# Altium PCB fixture-v1.0.PcbDoc
Units mil, origin at the board's own origin, x right, y up, seen from the top; angles counter-clockwise.
Board outline 4200 x 4200 mil, 2 copper layers (Top Layer, Bottom Layer); 22 components, 16 nets, 81 pads, 0 vias.
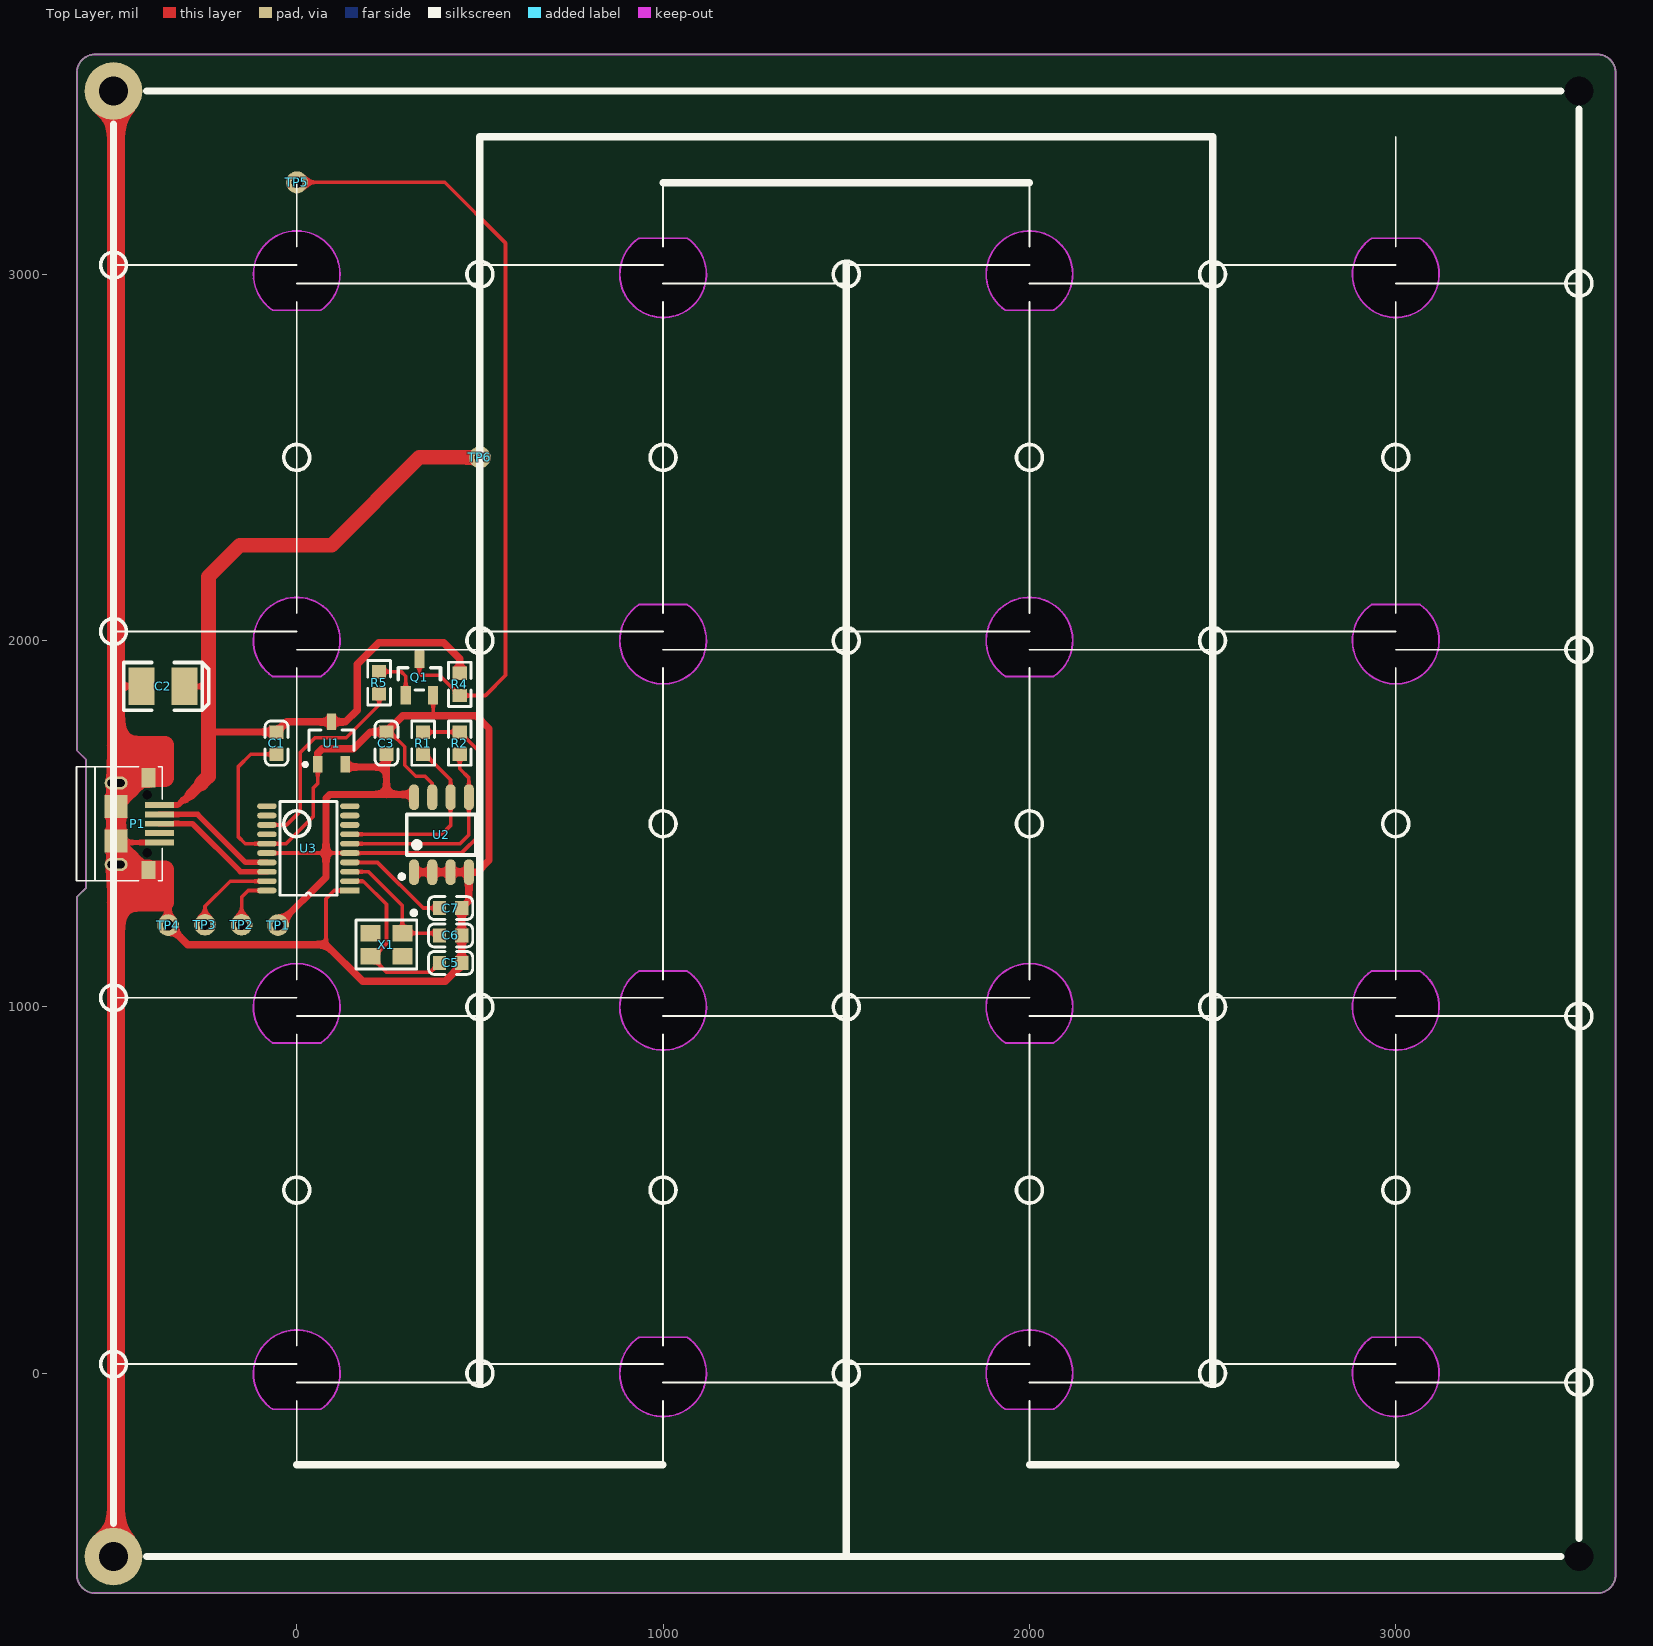
[diagram p0: Top Layer view]
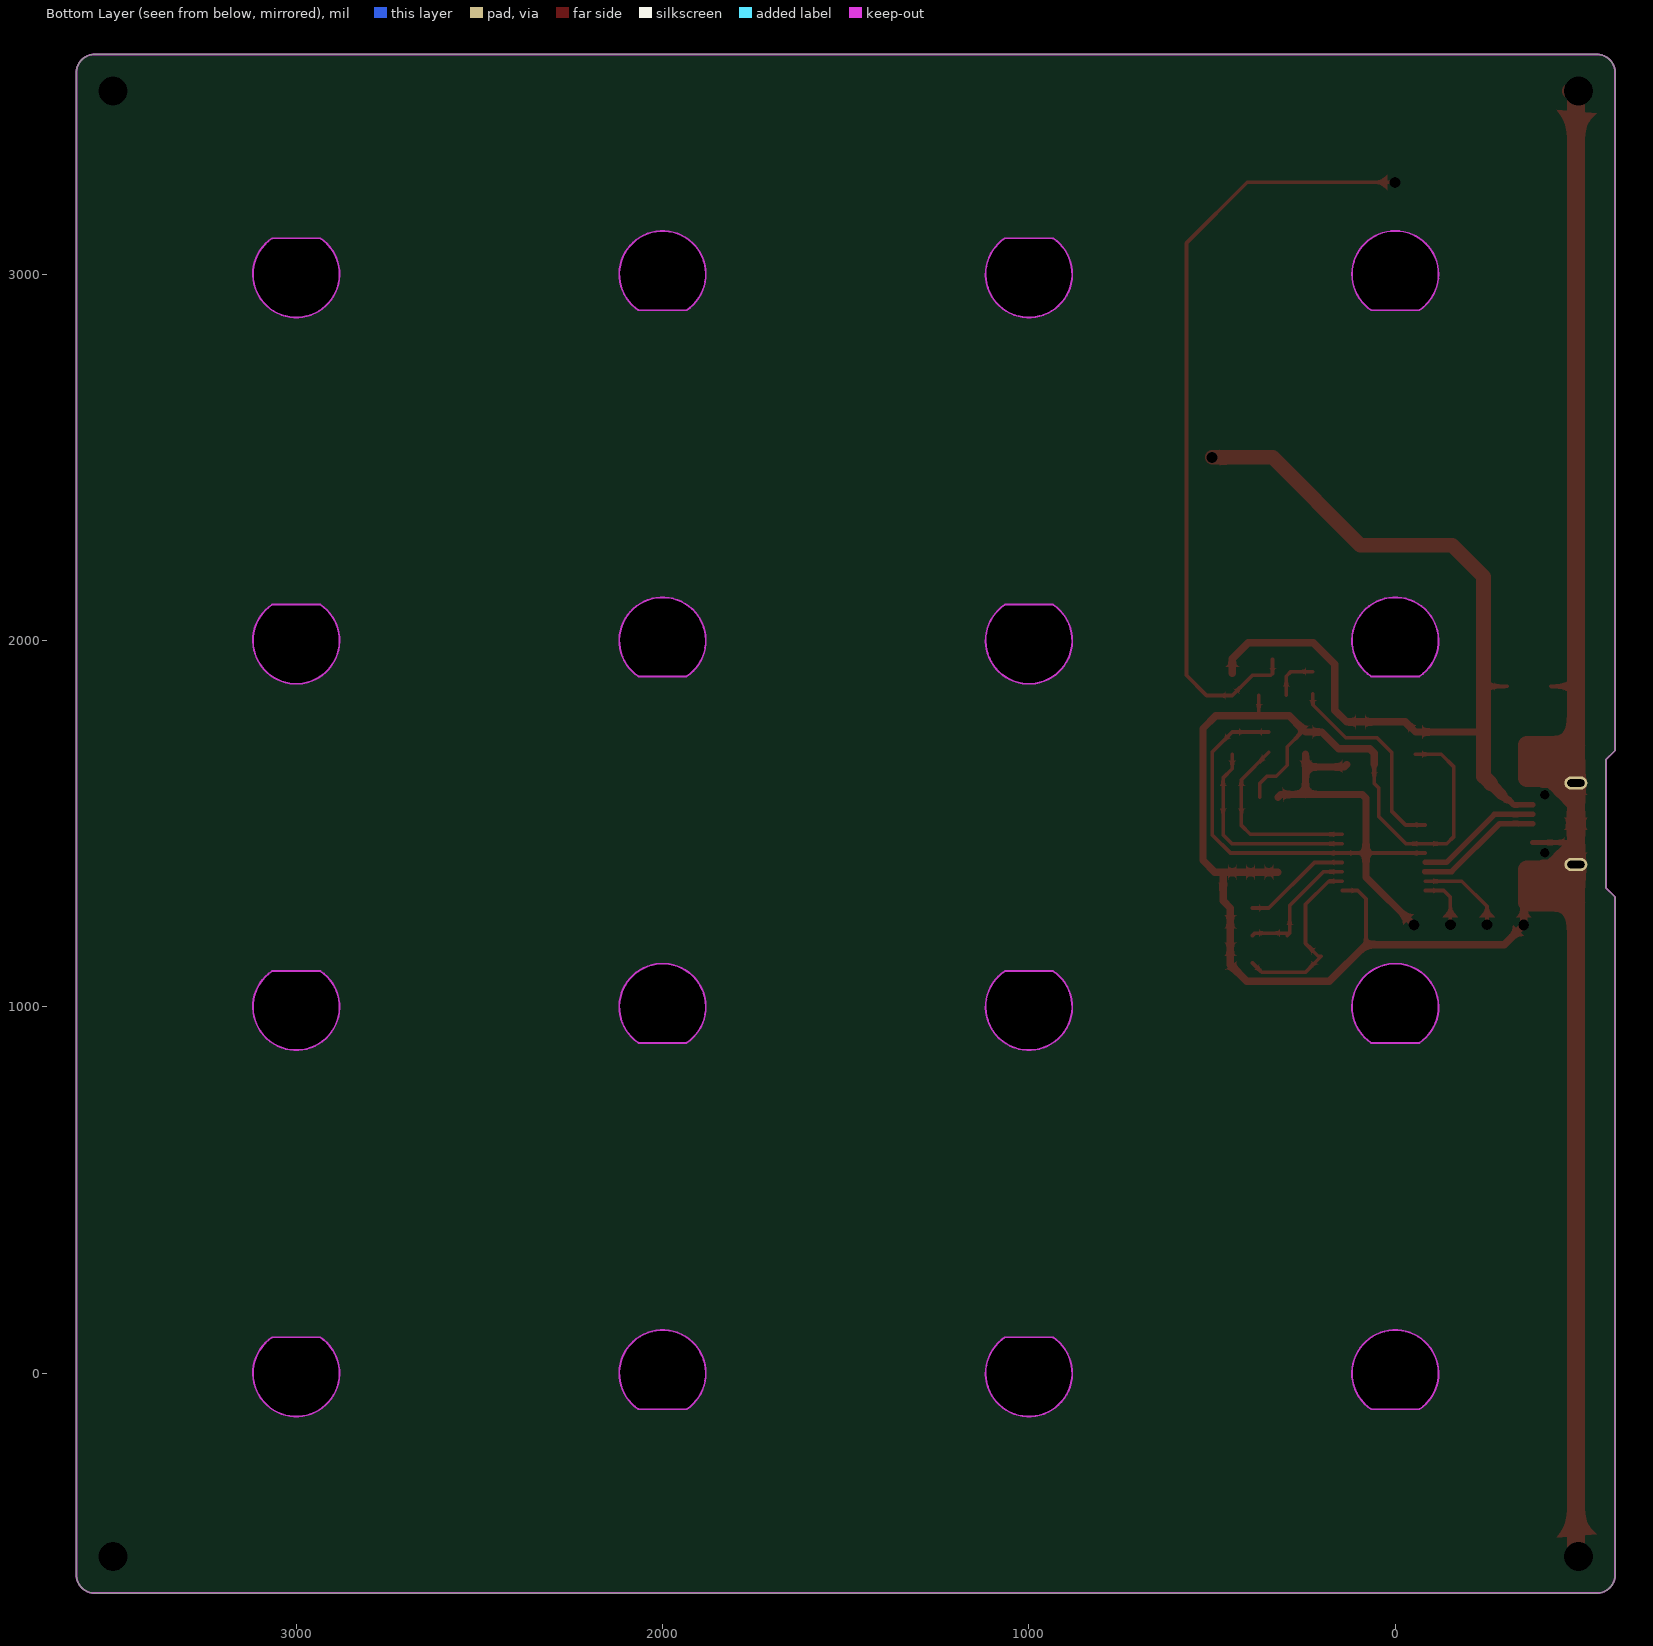
[diagram p1: Bottom Layer view, seen from below]
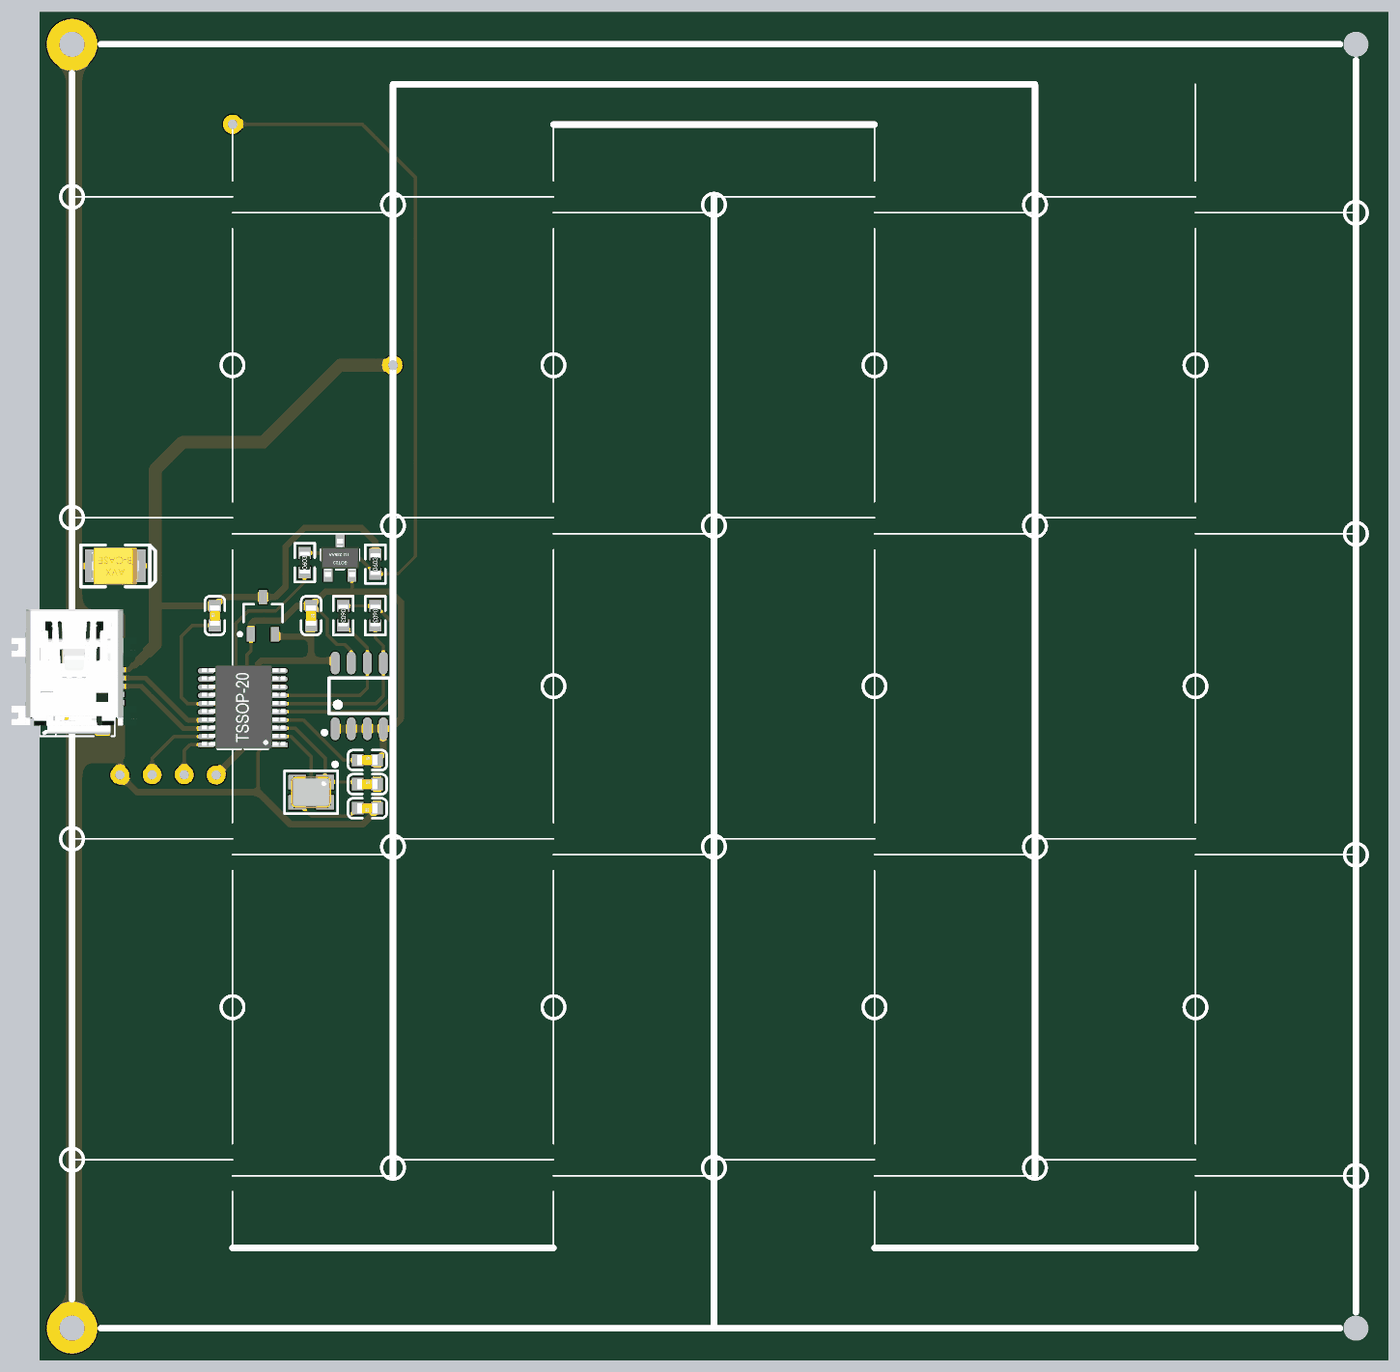
[diagram p2: 3D render of the assembled board from above, using the file's embedded part models]

## Layer stack, top to bottom
Top Solder: solder mask 0.4, Solder Resist, Dk 3.5
Top Layer: signal copper 1.4
Dielectric 1: dielectric 12.6, FR-4, Dk 4.8
Bottom Layer: signal copper 1.4
Bottom Solder: solder mask 0.4, Solder Resist, Dk 3.5

## Board outline
-600,-550 ccw(c-550,-550) -550,-600 3550,-600 ccw(c3550,-550) 3600,-550 3600,3550 ccw(c3550,3550) 3550,3600 -550,3600 ccw(c-550,3550) -600,3550 -600,1700 -575,1675 -575,1325 -600,1300
cut-out: 3000,2881.89 ccw(c3000,3000) 3065.29,3098.43 2934.71,3098.43 ccw(c3000,3000)
cut-out: 3000,1881.89 ccw(c3000,2000) 3065.29,2098.43 2934.71,2098.43 ccw(c3000,2000)
cut-out: 3000,881.89 ccw(c3000,1000) 3065.29,1098.43 2934.71,1098.43 ccw(c3000,1000)
cut-out: 3000,-118.11 ccw(c3000,0) 3065.29,98.43 2934.71,98.43 ccw(c3000,0)
cut-out: 2000,118.11 ccw(c2000,0) 1934.71,-98.43 2065.29,-98.43 ccw(c2000,0)
cut-out: 2000,1118.11 ccw(c2000,1000) 1934.71,901.57 2065.29,901.57 ccw(c2000,1000)
cut-out: 2000,2118.11 ccw(c2000,2000) 1934.71,1901.57 2065.29,1901.57 ccw(c2000,2000)
cut-out: 2000,3118.11 ccw(c2000,3000) 1934.71,2901.57 2065.29,2901.57 ccw(c2000,3000)
cut-out: 1000,2881.89 ccw(c1000,3000) 1065.29,3098.43 934.71,3098.43 ccw(c1000,3000)
cut-out: 1000,1881.89 ccw(c1000,2000) 1065.29,2098.43 934.71,2098.43 ccw(c1000,2000)
cut-out: 1000,881.89 ccw(c1000,1000) 1065.29,1098.43 934.71,1098.43 ccw(c1000,1000)
cut-out: 1000,-118.11 ccw(c1000,0) 1065.29,98.43 934.71,98.43 ccw(c1000,0)
cut-out: 0,118.11 ccw(c0,0) -65.29,-98.43 65.29,-98.43 ccw(c0,0)
cut-out: 0,1118.11 ccw(c0,1000) -65.29,901.57 65.29,901.57 ccw(c0,1000)
cut-out: 0,2118.11 ccw(c0,2000) -65.29,1901.57 65.29,1901.57 ccw(c0,2000)
cut-out: 0,3118.11 ccw(c0,3000) -65.29,2901.57 65.29,2901.57 ccw(c0,3000)
cut-out: 0,3120
cut-out: 0,3120
cut-out: 66.05,2901.57

## Design rules (kind name [scope] priority, off if disabled: settings)
Clearance [All] p1: gap=6 ignorepadtopadclearanceinfootprint=FALSE
PolygonConnect [All] p1: connectstyle=Relief reliefconductorwidth=10 reliefentries=4 polygonreliefangle="90 Angle" airgapwidth=10
RoutingVias [All] p1: holewidth=28 width=50 viastyle="Through Hole" minholewidth=28 minwidth=50 maxholewidth=28 maxwidth=50
SolderMaskExpansion [All] p1: expansion=4
Width [All] p1: maxlimit=1000 minlimit=7 preferedwidth=10
30 further rules are at their usual default settings.

## Components (designator, comment, footprint, x,y, rotation, side; value= is the part's Value field where it differs from the comment)
C1 "2.2uF (225) 10% 16V" LC-0603_C -55,1720 r90 top
C2 "100uF (107) ±10% 6.3V" LC-CASE-B_3528 -365,1875 r0 top
C3 "2.2uF (225) 10% 16V" LC-0603_C 245,1720 r270 top
C5 "6pF (6R0) 0.25pF 50V" LC-0603_C 420,1120 r180 top
C6 "6pF (6R0) 0.25pF 50V" LC-0603_C 420,1195 r0 top
C7 "100nF (104) 10% 50V" LC-0603_C 420,1270 r0 top
P1 "USB-5P" USBMICRO-5P -493.11,1500 r270 top locked
Q1 "MMBT5551  G1" LC-SOT-23(SOT-23-3) 335,1900 r270 top
R1 "10KΩ (1002) ±1%" LC-0603_R 345,1720 r270 top
R2 "10KΩ (1002) ±1%" LC-0603_R 445,1720 r270 top
R4 "510Ω (5100) ±1%" LC-0603_R 445,1880.31 r90 top
R5 "3.3KΩ (3301) ±1%" LC-0603_R 225,1885 r90 top
TP1 "TP" TestPoint#1 -50.45,1224.22 r270 top
TP2 "TP" TestPoint#1 -150,1225 r270 top
TP3 "TP" TestPoint#1 -250,1225 r270 top
TP4 "TP" TestPoint#1 -350.45,1224.22 r270 top
TP5 "TP" TestPoint#2 0,3250 r90 top
TP6 "TP" TestPoint#2 499.55,2499.22 r90 top
U1 "XC6206P332MR" LC-SOT-23-3L 95,1720 r270 top
U2 "M24C64-RMN6TP" LC-SOIC-8_150mil 395,1470 r0 top
U3 "STM32F072F6" TSSOP20 145,1317.64 r180 top
X1 "12MHZ 20PF 10PPM" LC-SMD-3225_4P 245,1170 r180 top

## Footprints (in the part's own frame and the unit in brackets; to place one, negate y for a bottom-side part, rotate by r counter-clockwise, add the part's x,y. Pads: shape width x height; smd on the part's side, far side on the other; paste and mask are expansions set on the pad)
LC-0603_C [mm]
  rect 0.93x0.98 smd: 1(-0.77,0) 2(0.77,0)
  silkscreen extent -1.53,-0.79 1.54,0.79, body extent -0.8,-0.4 0.8,0.4, height 0.3
LC-0603_R [mm]
  rect 0.93x0.98 smd: 1(-0.77,0) 2(0.77,0)
  silkscreen extent -1.53,-0.79 1.54,0.79, body extent -0.85,-0.4 0.85,0.4, height 0.56
LC-CASE-B_3528 [mm]
  rect 1.8x2.6 smd: 1(1.5,0) 2(-1.5,0)
  silkscreen extent -2.73,-1.65 3.16,1.65, body extent -1.85,-1.47 1.85,1.46, height 2.03
LC-SMD-3225_4P [mm]
  rect 1.4x1.15 smd: 1(-1.1,-0.8) 2(1.1,-0.8) 3(1.1,0.8) 4(-1.1,0.8)
  silkscreen extent -2.1,-2.35 2.1,1.7, body extent -1.6,-1.25 1.6,1.25, height 0.61
LC-SOIC-8_150mil [mm]
  oval 0.7x1.8 smd: 1(-1.905,-2.6) 2(-0.635,-2.6) 3(0.635,-2.6) 4(1.905,-2.6) 5(1.905,2.6) 6(0.635,2.6) 7(-0.635,2.6) 8(-1.905,2.6)
  silkscreen extent -2.9,-3.05 2.4,1.4
LC-SOT-23(SOT-23-3) [mm]
  rect 1.25x0.7 smd: 1(1.25,-0.95) 2(1.25,0.95) 3(-1.25,0)
  silkscreen extent -0.65,-1.46 0.9,1.46, body extent -1.5,-1.5 1.5,1.5, height 1.3
LC-SOT-23-3L [mm] "http://www.aosmd.com/res/packaging_information/SOT-23-3L.pdf"
  rect 1.15x0.65 smd: 1(1.475,-0.95) 2(1.475,0.95) 3(-1.475,0)
  silkscreen extent -0.9,-1.95 1.6,1.55, body extent -0.9,-1.55 0.9,1.55, height 1.25
TestPoint#1 [mm]
  round 1.5 / inner round 1.5 / far side round 0 hole 0.75 unplated: 1(0.02,-0.012)
TestPoint#2 [mm]
  round 1.524 / inner round 1.524 / far side round 0 hole 0.762 unplated: 1(0.02,-0.012)
TSSOP20 [mm]
  rect 1.35x0.4 smd: 1(0,0)
  oval 1.35x0.4 smd: 2(0,-0.65) 3(0,-1.3) 4(0,-1.95) 5(0,-2.6) 6(0,-3.25) 7(0,-3.9) 8(0,-4.55) 9(0,-5.2) 10(0,-5.85) 11(5.75,-5.85) 12(5.75,-5.2) 13(5.75,-4.55) 14(5.75,-3.9) 15(5.75,-3.25) 16(5.75,-2.6) 17(5.75,-1.95) 18(5.75,-1.3) 19(5.75,-0.65) 20(5.75,0)
  silkscreen extent 0.9,-6.18 4.85,0.33, body extent -0.5,-6.3 6.1,0.3, height 1.12
USBMICRO-5P [mm]
  rect 0.4x2 smd: 1(-1.3,3) 2(-0.65,3) 3(0,3) 4(0.65,3) 5(1.3,3)
  round 0 hole 0.65 unplated: G1(-2,2.15) G2(2,2.15)
  rect 1.35x1 smd: Shell(-3.2,2.25)
  oval 0.9x1.6 hole 0.5 slot 1.2 at 90 deg: Shell(-2.825,0) Shell(2.825,0)
  rect 1.6x1.6 smd: Shell(-1.2,0) Shell(1.2,0)
  rect 1.25x1 smd: Shell(3.2,2.25)
  silkscreen extent -3.95,-2.75 3.95,3.2, body extent -6.1,-4.95 3.93,4.95, height 3.91

## Part data
C1 C3: library part "0603 2.2uF (225) 10% 16V", "贴片电容", Package=0603, SuppliersPartNumber=C23630, ComponentLink1Description=供应, ComponentLink1URL=http://www.szlcsc.com/product/details_24366.html, Supplier=LC
C2: library part "3528 100uF (107) 10% 6.3V", "钽电容", Package=3528, SuppliersPartNumber=C16133, ComponentLink1Description=供应, ComponentLink1URL=http://www.szlcsc.com/product/details_16815.html, Supplier=LC
C5 C6: library part "0603 6pF (6R0) 0.25pF 50V", "贴片电容", Package=0603, SuppliersPartNumber=C37474, ComponentLink1Description=供应, ComponentLink1URL=http://www.szlcsc.com/product/details_38453.html, Supplier=LC
C7: library part "0603 100nF (104) 10% 50V", "贴片电容", Package=0603, SuppliersPartNumber=C14663, ComponentLink1Description=供应, ComponentLink1URL=http://www.szlcsc.com/product/details_15331.html, Supplier=LC
Q1: library part "SOT-23 MMBT5551  G1", "三极管", Package=SOT-23, SuppliersPartNumber=C2145, ComponentLink1Description=供应, ComponentLink1URL=http://www.szlcsc.com/product/details_2502.html, Supplier=LC
R1 R2: library part "0603 10KΩ (1002) 1%", "贴片电阻", Package=0603, SuppliersPartNumber=C25804, ComponentLink1Description=供应, ComponentLink1URL=http://www.szlcsc.com/product/details_26547.html, Supplier=LC
R4: library part "0603 510Ω (5100) 1%", "贴片电阻", Package=0603, SuppliersPartNumber=C23193, ComponentLink1Description=供应, ComponentLink1URL=http://www.szlcsc.com/product/details_23920.html, Supplier=LC
R5: library part "0603 3.3KΩ (3301) 1%", "贴片电阻", Package=0603, SuppliersPartNumber=C22978, ComponentLink1Description=供应, ComponentLink1URL=http://www.szlcsc.com/product/details_23705.html, Supplier=LC
TP1 TP2 TP3 TP4 TP5 TP6: "测试点", Part Field 1=20, Part Field 2=20
U1: library part "SOT-23 XC6206P332MR", "低压差线性稳压(LDO)", Package=SOT-23, SuppliersPartNumber=C5446, ComponentLink1Description=供应, ComponentLink1URL=http://www.szlcsc.com/product/details_5896.html, Supplier=LC
U2: "EEPROM", Package=SOIC-8_150mil, SuppliersPartNumber=C79988, ComponentLink1Description=供应, ComponentLink1URL=http://www.szlcsc.com/product/details_81133.html, Supplier=LC
X1: library part "SMD-3225_4P  12MHZ 20PF 10PPM", "贴片晶振", Package=SMD-3225_4P, SuppliersPartNumber=C9002, ComponentLink1Description=供应, ComponentLink1URL=http://www.szlcsc.com/product/details_9522.html, Supplier=LC

## Free pads (board coordinates)
  round 157.48 / inner round 157.48 / far side round 0 hole 78.74 unplated: 2(-500,-500) 2(-500,3500)
  round 60 hole 78.74 unplated: 2(3500,-500) 2(3500,3500)

## Nets (pads, with @x,y where several pads share a name; then routed paths per layer and width w, separated by ;. In a path a pad name is that pad's centre, name@x,y a point inside that pad or via, vN(x,y) a via of type N, cw(c..) or ccw(c..) an arc to the next point about the centre after c; other vN are vias at no path point)
3V3: C3.2 R1.1 R2.1 TP1.1 U1.2 U2.8 U3.5 U3.16 | length 1878.4
  Top Layer w10: U3.16 80,1420 U3.5 450,1420 500,1470 500,1695.31 R2.1 R1.1
  Top Layer w20: TP1.1 80,1354.35 80,1420 80,1570 90,1580 245,1580 ; U1.2 139.33,1655 245,1655 ; C3.2 245,1655 ; U2.8 312.36,1580 245,1580 ; 245,1580 245,1655
DM: P1.2 U3.17 | length 348
  Top Layer w15: P1.2 -270.59,1525.59 -139.41,1394.41 U3.17
DOUT: R5.1 U3.13 | length 565.9
  Top Layer w10: U3.13 -28.23,1496.77 10,1535 10,1695 50,1735 135.31,1735 225,1824.69 R5.1
DP: P1.3 U3.18 | length 350.9
  Top Layer w15: P1.3 -285,1500 -154.04,1369.04 -80.43,1369.04 -80,1368.6 -81.16,1368.6 U3.18
GND: C1.1 C2.2 C3.1 C5.1 C6.2 C7.2 P1.5 P1.Shell pad.2@-500,3500 pad.2@-500,-500 Q1.2 TP4.1 U1.1 U2.1 U2.2 U2.3 U2.4 U2.7 U3.1 U3.15 | length 9534.4
  Top Layer w10: pad.2@-500,3500 pad.2@-475,3500 ; -493.11,1875 C2.2 ; C1.1 -125.32,1689.68 -160,1655 -160,1465 -140.59,1445.59 U3.15 -29.41,1445.59 45,1520 45,1597.4 57.6,1610 U1.1 ; 80,1170 80,1295 102.64,1317.64 U3.1 ; C3.1 254.68,1750.32 295,1710 295,1660 325,1630 350,1630 370,1610 U2.7 ; 355,1795 355.79,1795.79 ; 370,1795 372.4,1797.4 Q1.2 ; 390,1795 392.4,1797.4
  Top Layer w15: P1.Shell@-489.17,1448.82 P1.5
  Top Layer w20: P1.Shell@-493.11,1388.78 -478.35,1374.02 -454.57,1374.02 -404.53,1374.02 -359.57,1329.06 -350.91,1320.39 TP4.1 -297.46,1170 80,1170 180,1070 405.57,1070 450.32,1114.75 C5.1 C6.2 C7.2 470,1289.68 U2.4 ; P1.Shell@-493.11,1452.76 P1.Shell@-489.17,1448.82 ; P1.Shell@-493.11,1611.22 -478.35,1625.98 -454.57,1625.98 P1.Shell@-404.53,1625.98 ; U1.1 57.6,1692.6 70,1705 155,1705 200.32,1750.32 C3.1 289.68,1795 355,1795 370,1795 390,1795 490,1795 525,1760 525,1400 492.64,1367.64 U2.4 ; U2.1 U2.2 U2.3 U2.4
  Top Layer w40: pad.2@-493.11,3481.89 pad.2@-475,3500
  Top Layer w50: pad.2@-500,-500 -493.11,-493.11 -493.11,1285.43 ; pad.2@-493.11,3481.89 -493.11,1875 -493.11,1714.57 ; -493.11,1285.43 -493.11,1388.78 P1.Shell@-493.11,1443.97 ; -493.11,1285.43 -454.57,1323.97 ; -493.11,1285.43 -435,1285.43 ; P1.Shell@-493.11,1443.97 -454.57,1405.43 ; P1.Shell@-493.11,1443.97 -493.11,1452.76 -493.11,1547.24 P1.Shell@-493.11,1556.03 ; P1.Shell@-493.11,1556.03 -454.57,1594.57 ; P1.Shell@-493.11,1556.03 -493.11,1611.22 -493.11,1714.57 ; -493.11,1714.57 -435,1714.57 ; -493.11,1714.57 -454.57,1676.03 ; -454.57,1323.97 P1.Shell@-404.53,1374.02 ; -454.57,1323.97 -454.57,1374.02 -454.57,1405.43 ; -454.57,1323.97 -454.57,1305 -435,1285.43 ; -454.57,1405.43 -426.61,1377.46 -404.53,1377.46 P1.Shell@-404.53,1374.02 ; -454.57,1594.57 -454.57,1625.98 -454.57,1676.03 ; -454.57,1594.57 -426.61,1622.54 -404.53,1622.54 P1.Shell@-404.53,1625.98 ; -454.57,1676.03 -454.57,1695 -435,1714.57 ; -454.57,1676.03 P1.Shell@-404.53,1625.98 ; -435,1285.43 -405,1285.43 ; -435,1714.57 -405,1714.57 ; -405,1285.43 -404.53,1285.91 P1.Shell@-404.53,1374.02 ; -405,1285.43 -359.57,1285.43 -359.57,1329.06 -359.57,1374.57 -360.12,1374.02 P1.Shell@-404.53,1374.02 ; -405,1714.57 -359.57,1714.57 -359.57,1625.43 -360.12,1625.98 P1.Shell@-404.53,1625.98 ; -405,1714.57 -404.53,1714.09 P1.Shell@-404.53,1625.98
LEDIN: Q1.3 R4.1 TP5.1 | length 2141.2
  Top Layer w10: TP5.1@1.23,3250 TP5.1 404.22,3250.78 570,3085 570,1905 515,1850 R4.1 390,1905 340,1905 335,1910 Q1.3
NetC5_2: C5.2 U3.2 X1.3 | length 507
  Top Layer w10: U3.2 181.91,1343.23 245,1280.14 245,1173.39 210.11,1138.5 X1.3 245.2,1095 364.68,1095 C5.2
NetC6_1: C6.1 U3.3 X1.1 | length 369.9
  Top Layer w10: U3.3 196.18,1368.82 288.31,1276.69 X1.1 ; X1.1@294.8,1195 X1.1 ; C6.1 383.19,1201.5 X1.1
NetC7_1: C7.1 U3.4 | length 296.2
  Top Layer w10: U3.4 220.59,1394.41 345,1270 C7.1
NetQ1_1: Q1.1 R5.2 | length 129.6
  Top Layer w10: R5.2 284.68,1915.32 297.6,1902.4 Q1.1
RES: U3.8
SCL: R1.2 U2.6 U3.7 | length 515.9
  Top Layer w10: U3.7 396.18,1471.18 420,1495 U2.6 420,1620 R1.2@345,1695
SDA: R2.2 U2.5 U3.6 | length 565.2
  Top Layer w10: U3.6 445.59,1445.59 470,1470 U2.5 470,1625 445,1650 R2.2
SWCLK: TP2.1 U3.20 | length 151.9
  Top Layer w10: TP2.1 -150.45,1299.55 -132.36,1317.64 U3.20
SWIO: TP3.1 U3.19 | length 247.8
  Top Layer w10: TP3.1 -250.45,1274.55 -181.77,1343.23 U3.19
VBUS: C1.2 C2.1 P1.1 R4.2 TP6.1 U1.3 | length 2569.9
  Top Layer w10: C2.1 -240.94,1875
  Top Layer w15: P1.1 -323.82,1551.18 -310,1565
  Top Layer w20: -310,1565 -305,1565 -290,1580 ; -240.63,1750.32 C1.2 -27.24,1778.07 U1.3 133.07,1778.07 165,1810 165,1935 223.82,1993.82 401.18,1993.82 445,1950 R4.2
  Top Layer w30: -290,1580 -260,1610
  Top Layer w40: -260,1610 -240.94,1629.06 -240.94,1875 ; -240.63,1874.68 -240.94,1875 ; TP6.1 335,2500 95,2260 -155,2260 -240.94,2174.06 -240.94,1875
pads on no net: P1.4 P1.G1 P1.G2 U3.9 U3.10 U3.11 U3.12 U3.14 X1.2 X1.4

## Keep-outs
Keep-Out Layer:
  lines w5: -66.05,-98.43 66.05,-98.43 ; -66.05,-97.92 cw(c0,0) 66.05,-97.92 ; -66.05,901.57 66.05,901.57 ; -66.05,902.08 cw(c0,1000) 66.05,902.08 ; -66.05,1901.57 66.05,1901.57 ; -66.05,1902.08 cw(c0,2000) 66.05,1902.08 ; -66.05,2901.57 66.05,2901.57 ; -66.05,2902.08 cw(c0,3000) -118.11,3000 cw(c0,3000) 0,3118.11 cw(c0,3000) 118.11,3000 cw(c0,3000) 66.05,2902.08 ; 933.95,97.92 ccw(c1000,0) 1066.05,97.92 ; 933.95,98.43 1066.05,98.43 ; 933.95,1097.92 ccw(c1000,1000) 1066.05,1097.92 ; 933.95,1098.43 1066.05,1098.43 ; 933.95,2097.92 ccw(c1000,2000) 1066.05,2097.92 ; 933.95,2098.43 1066.05,2098.43 ; 933.95,3097.92 ccw(c1000,3000) 1066.05,3097.92 ; 933.95,3098.43 1066.05,3098.43 ; 1933.95,-98.43 2066.05,-98.43 ; 1933.95,-97.92 cw(c2000,0) 2066.05,-97.92 ; 1933.95,901.57 2066.05,901.57 ; 1933.95,902.08 cw(c2000,1000) 2066.05,902.08 ; 1933.95,1901.57 2066.05,1901.57 ; 1933.95,1902.08 cw(c2000,2000) 2066.05,1902.08 ; 1933.95,2901.57 2066.05,2901.57 ; 1933.95,2902.08 cw(c2000,3000) 2066.05,2902.08 ; 2933.95,97.92 ccw(c3000,0) 3066.05,97.92 ; 2933.95,98.43 3066.05,98.43 ; 2933.95,1097.92 ccw(c3000,1000) 3066.05,1097.92 ; 2933.95,1098.43 3066.05,1098.43 ; 2933.95,2097.92 ccw(c3000,2000) 3066.05,2097.92 ; 2933.95,2098.43 3066.05,2098.43 ; 2933.95,3097.92 ccw(c3000,3000) 3066.05,3097.92 ; 2933.95,3098.43 3066.05,3098.43 ; -600,-550 ccw(c-550,-550) -550,-600 3550,-600 ccw(c3550,-550) 3600,-550 3600,3550 ccw(c3550,3550) 3550,3600 -550,3600 ccw(c-550,3550) -600,3550 -600,1700 -575,1675 -575,1325 -600,1300 -600,-550

## Silkscreen, mask and mechanical layers (free items; w line width, h text height)
Top Overlay:
  circle w10: c1000,2500 r35.36
  circle w10: c-500,1025 r35.36
  circle w10: c3500,975 r35.36
  circle w10: c0,1500 r35.36
  circle w10: c-500,2025 r35.36
  circle w10: c500,0 r35.36
  circle w10: c500,2000 r35.36
  circle w10: c500,3000 r35.36
  circle w10: c0,2500 r35.36
  circle w10: c500,1000 r35.36
  circle w10: c2000,2500 r35.36
  circle w10: c3000,500 r35.36
  circle w10: c3500,-25 r35.36
  circle w10: c2000,1500 r35.36
  circle w10: c3500,1975 r35.36
  circle w10: c2000,500 r35.36
  circle w10: c3000,2500 r35.36
  circle w10: c3500,2975 r35.36
  circle w10: c3000,1500 r35.36
  circle w10: c2500,2000 r35.36
  circle w10: c1500,3000 r35.36
  circle w10: c2500,1000 r35.36
  circle w10: c2500,3000 r35.36
  circle w10: c2500,0 r35.36
  circle w10: c1500,1000 r35.36
  circle w10: c1500,0 r35.36
  circle w10: c1500,2000 r35.36
  circle w10: c1000,500 r35.36
  circle w10: c1000,1500 r35.36
  circle w10: c-500,3025 r35.36
  circle w10: c0,500 r35.36
  circle w10: c-500,25 r35.36
  lines w5: -500,25 0,25 ; -500,1025 0,1025 ; -500,2025 0,2025 ; -500,3025 0,3025 ; 0,-250 0,-75 ; 0,-25 500,-25 ; 0,75 0,500 0,925 ; 0,975 500,975 ; 0,1075 0,1500 0,1925 ; 0,1975 500,1975 ; 0,2075 0,2500 0,2925 ; 0,2975 500,2975 ; 0,3075 0,3250 ; 500,25 1000,25 ; 500,1025 1000,1025 ; 500,2025 1000,2025 ; 500,3025 1000,3025 ; 1000,-250 1000,-75 ; 1000,-25 1500,-25 ; 1000,75 1000,500 1000,925 ; 1000,975 1500,975 ; 1000,1075 1000,1500 1000,1925 ; 1000,1975 1500,1975 ; 1000,2075 1000,2500 1000,2925 ; 1000,2975 1500,2975 ; 1000,3075 1000,3250 ; 1500,25 2000,25 ; 1500,1025 2000,1025 ; 1500,2025 2000,2025 ; 1500,3025 2000,3025 ; 2000,-250 2000,-75 ; 2000,-25 2500,-25 ; 2000,75 2000,500 2000,925 ; 2000,975 2500,975 ; 2000,1075 2000,1500 2000,1925 ; 2000,1975 2500,1975 ; 2000,2075 2000,2500 2000,2925 ; 2000,2975 2500,2975 ; 2000,3075 2000,3250 ; 2500,25 3000,25 ; 2500,1025 3000,1025 ; 2500,2025 3000,2025 ; 2500,3025 3000,3025 ; 3000,-250 3000,-75 ; 3000,-25 3500,-25 ; 3000,75 3000,500 3000,925 ; 3000,975 3500,975 ; 3000,1075 3000,1500 3000,1925 ; 3000,1975 3500,1975 ; 3000,2075 3000,2500 3000,2925 ; 3000,2975 3500,2975 ; 3000,3075 3000,3375
  lines w20: -500,-410 -500,3410 ; -410,-500 3450,-500 ; -410,3500 3450,3500 ; 0,-250 1000,-250 ; 500,-25 500,3375 2500,3375 2500,-25 ; 1000,3250 2000,3250 ; 1500,-500 1500,3025 ; 2000,-250 3000,-250 ; 3500,-450 3500,3450